# EAGLE board max31855-breakout (EAGLE 6.3)
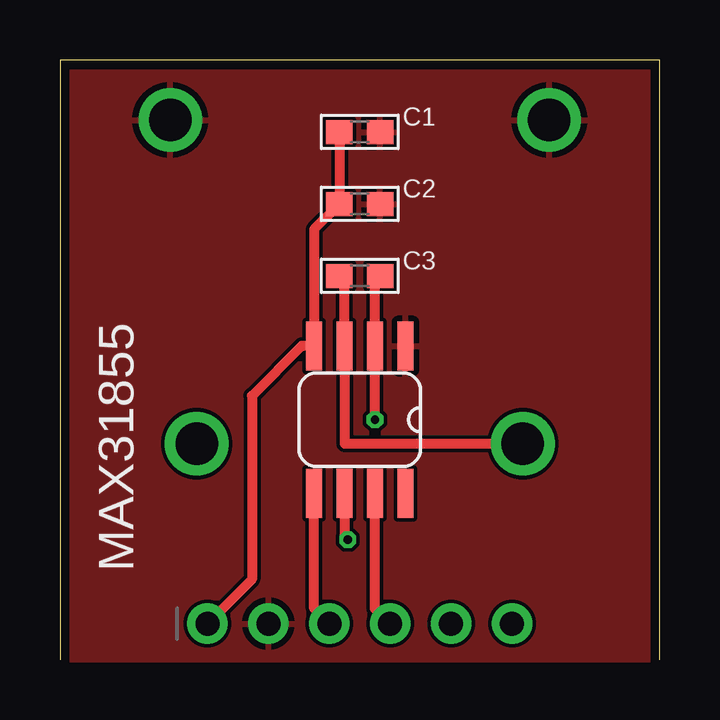
[diagram p0: board, top side]
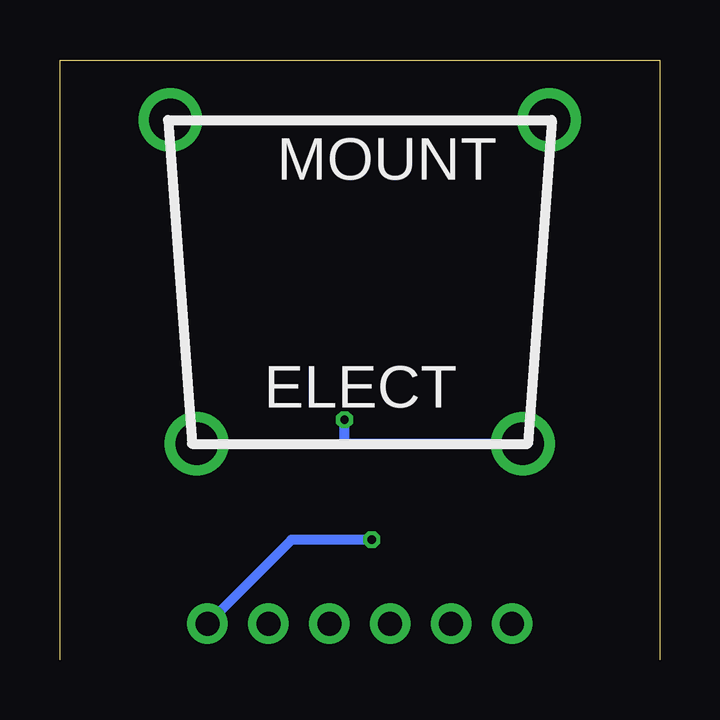
[diagram p1: board, bottom side, seen from below]

Size 25 x 25 mm. Coordinates in mm from the lower left corner, seen from the top.
Outline: 25,0 25,25 0,25 0,0
Copper layers (1*16): Top 0.0356mm / dielectric 1.5011mm / Bottom 0.0356mm
Design rules "LaenPCBOrder *": minimum track width 6mil, minimum drill 13mil, track to track 6mil, track to pad 6mil, pad to pad 6mil, via to via 6mil, smd to smd 6mil, copper to edge 15mil, drill to drill 6mil, minimum pad ring 7mil, minimum via ring 7mil, stop-mask expansion 4mil, vias tented up to drill 100mil, thermal gap 10mil

## Footprints (pad centres in the part's own frame; a part is rotated, then mirrored left to right if it is on the bottom)
0603 = smd 1.1 x 1: 1 -0.85,0; 2 0.85,0
1X06_ROUND = drill 1 pad 1.676: 1 -6.35,0; 2 -3.81,0; 3 -1.27,0; 4 1.27,0; 5 3.81,0; 6 6.35,0
SO-08 = smd 0.66 x 2.032: 1 -1.905,-3.073; 2 -0.635,-3.073; 3 0.635,-3.073; 4 1.905,-3.073; 5 1.905,3.073; 6 0.635,3.073; 7 -0.635,3.073; 8 -1.905,3.073
PCC-SMP = drill 1.77: +2 -6.8,0; -3 6.8,0; GND@1 -7.9,13.5; GND@4 7.9,13.5

## Placement (x,y rotation side)
C1  .1uF  [0603]  12.5,22 0 top
C2  1uF  [0603]  12.5,19 0 top
C3  10nF  [0603]  12.5,16 0 top
JP1  [1X06_ROUND]  12.5,1.5 0 top
U$1  MAX31855  [SO-08]  12.5,10 180 top
U$2  OMEGAPCC-SMP  [PCC-SMP]  12.5,9 0 bottom

## Library data of the parts
C1-C3 JP1 U$1 U$2 = nonolith

## Nets
3V3: C1.1 C2.1 JP1.1 U$1.4
CS: JP1.6 U$1.6
GND: C1.2 C2.2 JP1.2 U$1.1 U$2.GND@1 U$2.GND@4
SCK: JP1.3 U$1.5
SI: JP1.5
SO: JP1.4 U$1.7
T+: C3.1 U$1.3 U$2.+2
T-: C3.2 U$1.2 U$2.-3

## Tracks (layer width: path | path; a pad name or v marks a point on that pad's centre or on a via)
3V3
  Top 0.406: C1.1 C2.1 10.6,17.95 U$1.4 10.07,13.07 8,11 8,3.35 JP1.1
CS  (via drill 0.35)
  Top 0.406: U$1.6 11.87,5.13 v12,5
  Bottom 0.406: v12,5 15.35,5 JP1.6
GND
  pour Top: 0,25 25,25 25,0 0,0
SCK
  Top 0.406: U$1.5 10.6,2.13 JP1.3
SO
  Top 0.406: U$1.7 13.13,2.13 JP1.4
T+
  Top 0.406: U$2.+2 11.87,9 U$1.3 11.87,15.79 C3.1
T-  (via drill 0.35)
  Top 0.406: v13.13,10 U$1.2 13.13,15.79 C3.2
  Bottom 0.406: U$2.-3 13.13,9 v13.13,10